# EAGLE board shupito (EAGLE 5.11)
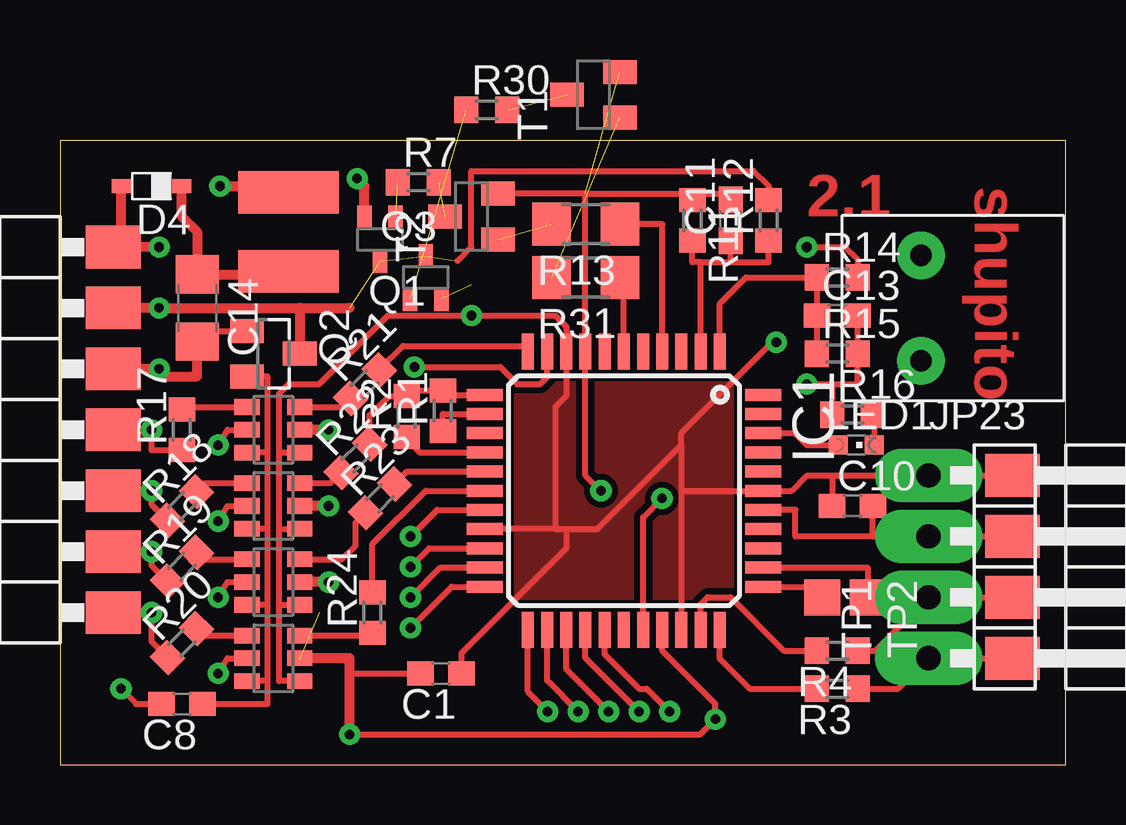
[diagram p0: board, top side]
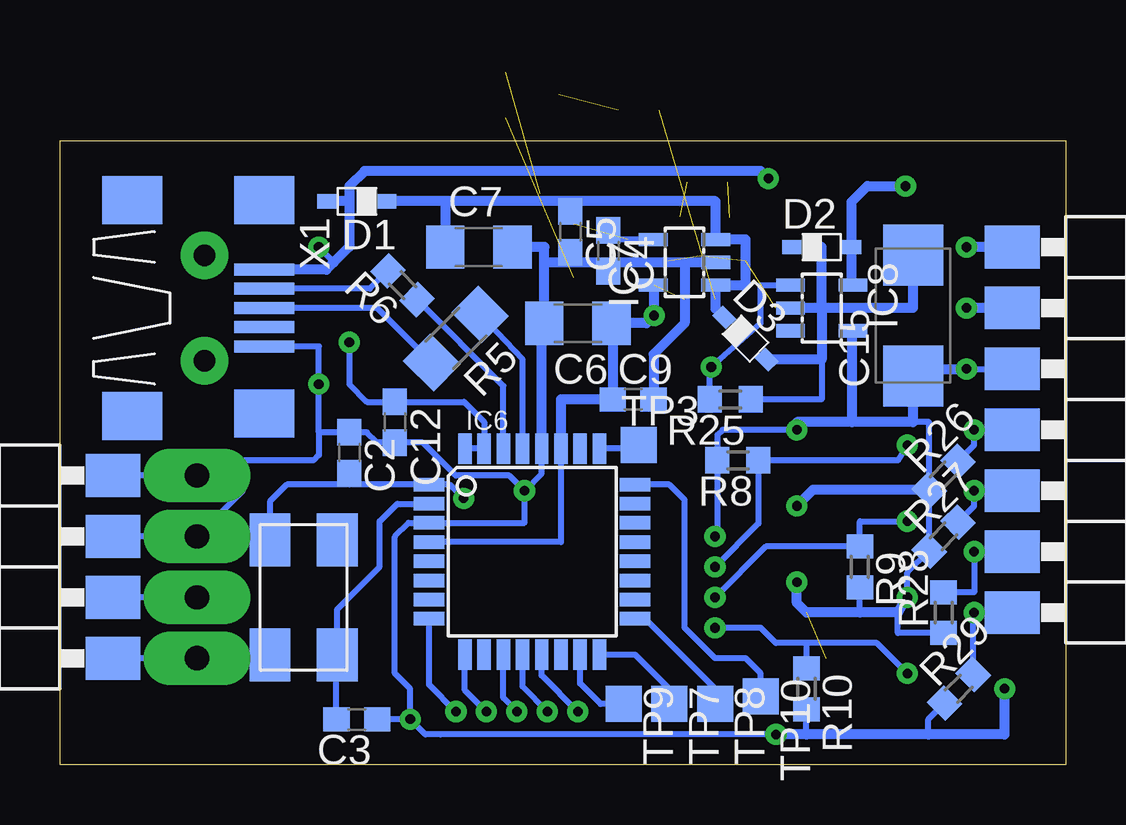
[diagram p1: board, bottom side, seen from below]

Size 41.9 x 26.02 mm. Coordinates in mm from the lower left corner, seen from the top.
Outline: 0,0 41.9,0 41.9,26.02 0,26.02 0,0
Copper layers (1*16): Top 0.018mm / dielectric 1.5mm / Bottom 0.018mm
Design rules "default *": minimum track width 0.2mm, minimum drill 0.4mm, track to track 0.2mm, track to pad 0.2mm, pad to pad 0.2mm, via to via 0.2mm, smd to smd 0.2mm, copper to edge 0.4mm, drill to drill 0.4mm, minimum pad ring 0.2mm, minimum via ring 0.2mm, stop-mask expansion 4mil, vias tented up to drill 0mil, thermal gap 10mil

## Footprints (pad centres in the part's own frame; a part is rotated, then mirrored left to right if it is on the bottom)
C0603 = smd 1.1 x 1: 1 -0.85,0; 2 0.85,0
C1206 = smd 1.6 x 1.8: 1 -1.4,0; 2 1.4,0
C/6032-28R = smd 2.55 x 2.5: + 2.525,0; - -2.525,0
SOD323 = smd 0.8 x 0.6: A 1.25,0; C -1.25,0
TQFP44 = smd 1.5 x 0.5: 1 -5.8,4; 2 -5.8,3.2; 3 -5.8,2.4; 4 -5.8,1.6; 5 -5.8,0.8; 6 -5.8,0; 7 -5.8,-0.8; 8 -5.8,-1.6; 9 -5.8,-2.4; 10 -5.8,-3.2; 11 -5.8,-4; 23 5.8,-4; 24 5.8,-3.2; 25 5.8,-2.4; 26 5.8,-1.6; 27 5.8,-0.8; 28 5.8,0; 29 5.8,0.8; 30 5.8,1.6; 31 5.8,2.4; 32 5.8,3.2; 33 5.8,4 | smd 0.5 x 1.5: 12 -4,-5.8; 13 -3.2,-5.8; 14 -2.4,-5.8; 15 -1.6,-5.8; 16 -0.8,-5.8; 17 0,-5.8; 18 0.8,-5.8; 19 1.6,-5.8; 20 2.4,-5.8; 21 3.2,-5.8; 22 4,-5.8; 34 4,5.8; 35 3.2,5.8; 36 2.4,5.8; 37 1.6,5.8; 38 0.8,5.8; 39 0,5.8; 40 -0.8,5.8; 41 -1.6,5.8; 42 -2.4,5.8; 43 -3.2,5.8; 44 -4,5.8
SOT236 = smd 0.65 x 1.06: 1 -0.95,-1.1; 2 0,-1.1; 3 0.95,-1.1; 4 0.95,1.1; 5 0,1.1; 6 -0.95,1.1
TQFP32-08 = smd 1.27 x 0.559: 1 -4.293,2.8; 2 -4.293,2; 3 -4.293,1.2; 4 -4.293,0.4; 5 -4.293,-0.4; 6 -4.293,-1.2; 7 -4.293,-2; 8 -4.293,-2.8; 17 4.293,-2.8; 18 4.293,-2; 19 4.293,-1.2; 20 4.293,-0.4; 21 4.293,0.4; 22 4.293,1.2; 23 4.293,2; 24 4.293,2.8 | smd 0.559 x 1.27: 9 -2.8,-4.293; 10 -2,-4.293; 11 -1.2,-4.293; 12 -0.4,-4.293; 13 0.4,-4.293; 14 1.2,-4.293; 15 2,-4.293; 16 2.8,-4.293; 25 2.8,4.293; 26 2,4.293; 27 1.2,4.293; 28 0.4,4.293; 29 -0.4,4.293; 30 -1.2,4.293; 31 -2,4.293; 32 -2.8,4.293
SOT23-DBV = smd 0.55 x 1.2: 1 -0.95,-1.3; 2 0,-1.3; 3 0.95,-1.3; 4 0.95,1.3; 5 -0.95,1.3
PINH1X01SMD = smd 1.778 x 2.286: 1 0,-2.223
1X04/90 = drill 1.016 long: 1 -3.81,-3.81; 2 -1.27,-3.81; 3 1.27,-3.81; 4 3.81,-3.81
1515 = smd 1.778 x 4.191: 1 -1.651,0; 2 1.651,0
CHIPLED_0603 = smd 0.8 x 0.8: A 0,-0.75; C 0,0.75
SOT323-BEC = smd 0.6 x 1: 1 -0.65,-0.9; 2 0.65,-0.9; 3 0,0.9
SOT23 = smd 1 x 1.4: 1 -0.95,-1.1; 2 0.95,-1.1; 3 0,1.1
R0603 = smd 1 x 1.1: 1 -0.85,0; 2 0.85,0
R1206 = smd 1.6 x 1.803: 1 -1.422,0; 2 1.422,0
SOT23-BEC = smd 1 x 1.4: B -0.95,-1.1; C 0,1.1; E 0.95,-1.1
TP15SQ = smd 1.5 x 1.5: TP 0,0
USB-MB-S = smd 2.5 x 0.5: D+ 2.5,0; D- 2.5,0.8; GND 2.5,-1.6; ID 2.5,-0.8; VBUS 2.5,1.6 | smd 2.5 x 2: P$1 -3,-4.5; P$2 -3,4.5; P$3 2.5,-4.4; P$4 2.5,4.5 | drill 0.9 round: P$5 0,2.2; P$6 0,-2.2
6X3.6_LARGE = smd 2.2 x 1.7: 1 -2.4,-1.4; 2 2.4,-1.4; 3 2.4,1.4; 4 -2.4,1.4

## Placement (x,y rotation side)
C1  100n  [C0603]  15.88,3.81 180 top
C2  18p  [C0603]  29.84,13.02 270 bottom
C3  18p  [C0603]  29.53,1.91 180 bottom
C4  10n  [C0603]  19.05,21.43 270 bottom
C5  100n  [C0603]  20.64,22.23 270 bottom
C6  2.2u  [C1206]  20.32,18.41 180 bottom
C7  4.7u  [C1206]  24.45,21.59 0 bottom
C8  100n  [C0603]  5.08,2.54 180 top
C9  100n  [C0603]  18.02,15.24 0 bottom
C10  100n  [C0603]  33.02,10.79 0 top
C11  10n  [C0603]  27.94,22.7 90 top
C12  100n  [C0603]  27.94,14.29 270 bottom
C13  10n  [C0603]  32.38,18.73 0 top
C14  10u-1759434  [C1206]  5.71,19.05 270 top
C15  68u-1672624  [C/6032-28R]  6.35,18.73 90 bottom
D1  BAT42WS  [SOD323]  29.53,23.5 180 bottom
D2  PMEG2005-1757760  [SOD323]  10.16,21.59 0 bottom
D3  BAT42WS  [SOD323]  13.34,17.78 315 bottom
D4  PMEG4010CEJ-1757777  [SOD323]  3.81,24.13 180 top
IC1  AVR_XMEGA_A4_44A  [TQFP44]  23.5,11.43 270 top
IC2  74LVC1T45  [SOT236]  8.89,13.97 90 top
IC3  74LVC1T45  [SOT236]  8.89,10.79 90 top
IC4  74LVC1T45  [SOT236]  8.89,7.62 90 top
IC5  74LVC1T45  [SOT236]  8.89,4.45 90 top
IC6  ATMEGA8U2  [TQFP32-08]  22.23,8.89 0 bottom
IC7  TPS73033DBV  [SOT23-DBV]  15.88,20.95 90 bottom
IC8  NCP1400A  [SOT23-DBV]  10.16,19.05 270 bottom
JP1  PINH1X01SMD  [PINH1X01SMD]  0,13.97 90 top
JP2  PINH1X01SMD  [PINH1X01SMD]  0,11.43 90 top
JP3  PINH1X01SMD  [PINH1X01SMD]  0,8.89 90 top
JP4  PINH1X01SMD  [PINH1X01SMD]  0,6.35 90 top
JP5  PINH1X01SMD  [PINH1X01SMD]  0,19.05 90 top
JP6  PINH1X01SMD  [PINH1X01SMD]  0,16.51 90 top
JP7  PINH1X01SMD  [PINH1X01SMD]  41.91,4.45 270 top
JP8  PINH1X01SMD  [PINH1X01SMD]  41.91,6.99 270 top
JP9  PINH1X01SMD  [PINH1X01SMD]  41.91,9.53 270 top
JP10  PINH1X01SMD  [PINH1X01SMD]  41.91,12.06 270 top
JP11  PINH1X01SMD  [PINH1X01SMD]  0,21.59 90 top
JP12  PINH1X01SMD  [PINH1X01SMD]  0,13.97 270 bottom
JP13  PINH1X01SMD  [PINH1X01SMD]  0,19.05 270 bottom
JP14  PINH1X01SMD  [PINH1X01SMD]  0,11.43 270 bottom
JP15  PINH1X01SMD  [PINH1X01SMD]  0,8.89 270 bottom
JP16  PINH1X01SMD  [PINH1X01SMD]  0,6.35 270 bottom
JP17  PINH1X01SMD  [PINH1X01SMD]  0,16.51 270 bottom
JP18  PINH1X01SMD  [PINH1X01SMD]  0,21.59 270 bottom
JP19  PINH1X01SMD  [PINH1X01SMD]  41.91,4.45 90 bottom
JP20  PINH1X01SMD  [PINH1X01SMD]  41.91,6.99 90 bottom
JP21  PINH1X01SMD  [PINH1X01SMD]  41.91,9.53 90 bottom
JP22  PINH1X01SMD  [PINH1X01SMD]  41.91,12.06 90 bottom
JP23  BTH  [1X04/90]  40.01,8.26 270 top
L2  22u-1782802  [1515]  9.53,22.23 90 top
LED1  ORANGE-8554552  [CHIPLED_0603]  33.18,13.34 270 top
Q1  BC807W-1907646  [SOT323-BEC]  13.34,21.91 180 top
Q2  NX2301P-1894738  [SOT23]  8.89,17.14 270 top
Q3  BC807W-1907646  [SOT323-BEC]  15.24,20.32 0 top
R1  22  [R0603]  15.95,14.76 90 top
R2  22  [R0603]  14.45,14.53 90 top
R3  100  [R0603]  32.38,3.17 180 top
R4  100  [R0603]  32.38,4.76 180 top
R5  22  [R1206]  25.4,17.78 225 bottom
R6  22  [R0603]  27.63,20 135 bottom
R7  10k  [R0603]  14.92,24.29 0 top
R8  10k  [R0603]  13.65,12.7 180 bottom
R9  10k  [R0603]  8.57,8.26 270 bottom
R10  10k  [R0603]  10.8,3.18 270 bottom
R11  1k5  [R0603]  26.35,22.7 270 top
R12  6k8  [R0603]  29.53,22.7 90 top
R13  47k  [R1206]  21.91,22.54 180 top
R14  6k8  [R0603]  32.38,20.32 0 top
R15  1k5  [R0603]  32.38,17.14 0 top
R16  68  [R0603]  33.02,14.61 0 top
R17  100  [R0603]  5.08,13.97 90 top
R18  100  [R0603]  5.08,10.79 45 top
R19  100  [R0603]  5.08,8.26 45 top
R20  100  [R0603]  5.08,5.08 45 top
R21  100  [R0603]  12.7,15.88 45 top
R22  100  [R0603]  12.3,12.78 45 top
R23  100  [R0603]  13.34,11.11 45 top
R24  100  [R0603]  13.02,6.35 90 top
R25  68k  [R0603]  13.97,15.24 180 bottom
R26  100  [R0603]  5.08,12.06 45 bottom
R27  100  [R0603]  5.08,9.53 45 bottom
R28  100  [R0603]  5.08,6.35 90 bottom
R29  100  [R0603]  4.45,3.17 45 bottom
R30  10k  [R0603]  17.78,27.3 0 top
R31  47k  [R1206]  21.91,20.32 180 top
T1  PDTC114TT-1757986  [SOT23-BEC]  22.23,27.94 90 top
T2  PDTC114TT-1757986  [SOT23-BEC]  17.14,22.86 90 top
TP1  TPTP15SQ  [TP15SQ]  31.75,6.99 270 top
TP2  TPTP15SQ  [TP15SQ]  33.66,6.99 270 top
TP3  TPTP15SQ  [TP15SQ]  17.78,13.34 0 bottom
TP7  TPTP15SQ  [TP15SQ]  16.51,2.54 270 bottom
TP8  TPTP15SQ  [TP15SQ]  14.61,2.54 270 bottom
TP9  TPTP15SQ  [TP15SQ]  18.41,2.54 270 bottom
TP10  TPTP15SQ  [TP15SQ]  12.7,2.86 270 bottom
X1  [USB-MB-S]  35.88,19.05 0 bottom
X2  ABMM2-8MHz  [6X3.6_LARGE]  31.75,6.99 90 bottom

## Library data of the parts
C1-C15 R1-R31 = rcl
D1-D4 = diode
IC1 = xmega
IC2-IC5 = 74lvc1t45
IC6 = atmega_u2
IC7 = tps73033
IC8 = ncp1400a
JP1-JP22 = pinhead_smd
JP23 = pinhead
L2 = inductors
LED1 = led
Q1 Q3 = transistor-pnp
Q2 = transistors
T1 T2 = transistor
TP1-TP3 TP7-TP10 = testpad
X1 = con-usb-3
X2 = xtal

## Nets
3V3_SUP: IC1.6 R31.1
5V0_SUP: IC1.4 R13.1
+5V: D1.A Q1.2 R14.2 X1.VBUS
D+: IC6.29 R5.1
D-: IC6.30 R6.1
EM_BOOT: IC6.25 TP3.TP
GND: C1.2 C2.1 C3.1 C4.2 C5.2 C6.2 C7.2 C8.2 C9.2 C10.2 C11.2 C12.2 C13.2 C14.2 C15.- IC1.8 IC1.18 IC1.30 IC1.38 IC2.2 IC3.2 IC4.2 IC4.5 IC5.2 IC6.3 IC6.28 IC7.2 IC8.4 JP6.1 JP9.1 JP17.1 JP21.1 JP23.2 Q2.1 R8.2 R9.2 R10.2 R11.1 R15.2 R16.1 R26.1 R27.1 R28.1 R29.1 T1.E T2.E X1.GND
LED: IC1.42 LED1.A
N$1: JP7.1 JP19.1 JP23.4 R3.1
N$2: IC1.35 TP2.TP
N$3: IC1.34 TP1.TP
N$4: IC1.15 R2.1
N$5: IC2.4 R17.2
N$6: R31.2 T1.B
N$7: JP2.1 JP14.1 R18.1 R27.2
N$8: IC1.13 R1.1
N$9: IC3.4 R18.2
N$10: JP8.1 JP20.1 JP23.3 R4.1
N$11: IC1.32 R4.2
N$12: IC1.33 R3.2
N$13: R6.2 X1.D-
N$14: R5.2 X1.D+
N$16: C14.1 D4.C L2.1
N$17: C4.1 IC7.4
N$18: IC6.24 TP10.TP
N$19: Q1.1 R7.1
N$20: R13.2 T2.B
N$21: C5.1 C7.1 D1.C D3.C IC7.1 IC7.3
N$22: D2.A IC8.5 L2.2
N$23: R7.2 T2.C
N$24: LED1.C R16.2
N$25: IC4.4 R19.2
N$26: R30.2 T1.C
N$27: IC5.4 R20.2
N$28: Q3.1 R30.1
N$29: C8.1 IC2.6 IC3.6 IC4.6 IC5.6 Q2.2
N$30: IC2.3 R21.1
N$31: IC3.3 R22.1
N$32: IC4.3 R23.1
N$33: IC5.3 R24.1
N$34: C3.2 IC6.2 X2.1
N$35: JP1.1 JP12.1 R17.1 R26.2
N$36: JP3.1 JP15.1 R19.1 R28.2
N$37: JP4.1 JP16.1 R20.1 R29.2
PDI: IC1.12 R1.2 R2.2 R22.2
PDID: IC1.21 IC3.5 R9.1
PWR_EN: IC1.10 IC8.1 R25.2
RST: IC1.11 R21.2
RSTD: IC1.20 IC2.5 R8.1
RXD: IC1.16 R23.2
SWITCHED_5V: C15.+ D2.C D3.A IC8.2 R25.1
SYS_CLK: C2.2 IC1.29 IC6.1 X2.3
TXD: IC1.17 R24.2
TXDD: IC1.22 IC5.5 R10.1
USB_CTS: IC1.24 IC6.12
USB_PDI: IC6.16 TP7.TP
USB_PDO: IC6.17 TP8.TP
USB_RTR: IC1.23 IC6.13
USB_RX: IC1.26 IC6.9
USB_SCK: IC6.15 TP9.TP
USB_TX: IC1.27 IC6.8
USB_VCC: C13.1 IC1.1 R14.1 R15.1
USB_XCK: IC1.25 IC6.11
VCC: C1.1 C6.1 C9.1 C10.1 C12.1 IC1.9 IC1.19 IC1.31 IC1.39 IC2.1 IC3.1 IC4.1 IC5.1 IC6.4 IC6.27 IC6.31 IC6.32 IC7.5 JP10.1 JP22.1 JP23.1 Q3.2
VCCIO: JP5.1 JP13.1 Q1.3 Q2.3 Q3.3 R12.2
VDD: D4.A JP11.1 JP18.1
VDD_ADC: C11.1 IC1.2 R11.2 R12.1

## Tracks (layer width: path | path; a pad name or v marks a point on that pad's centre or on a via)
3V3_SUP
  Top 0.254: IC1.6 23.5,20.32 R31.1
5V0_SUP
  Top 0.254: IC1.4 25.09,22.54 R13.1
+5V  (via drill 0.4)
  Top 0.254: R14.2 33.23,21.06 32.7,21.59 v31.11,21.59
  Top 0.406: Q1.2 12.69,24.14 v12.38,24.45
  Bottom 0.254: v31.11,21.59 | 30.49,20.96 v31.11,21.59 | v12.38,24.45 12.38,24.43
  Bottom 0.406: X1.VBUS 30.8,20.65 30.49,20.96 29.84,21.6 29.84,23.5 | 29.84,23.5 29.84,24.13 29.21,24.77 12.7,24.77 v12.38,24.45 | 29.84,23.5 D1.A
D+
  Bottom 0.254: IC6.29 22.62,16.91 R5.1
D-
  Bottom 0.254: IC6.30 23.43,15.8 R6.1
EM_BOOT
  Bottom 0.254: IC6.25 17.78,13.18 TP3.TP
GND  (via drill 0.4)  (2 unrouted)
  Top 0.254: C8.2 3.17,2.54 v2.54,3.17 | JP21.1 JP23.2 33.87,9.53 | IC1.38 30.64,10.63 30.64,9.53 33.87,9.53 | IC1.30 25.09,4.75 27.3,2.54 v27.3,1.91 26.67,1.27 v12.06,1.27 | IC4.5 6.99,7.62 v6.59,6.99 | 21.89,23.81 IC1.8 21.89,12.08 v22.54,11.43 | 26.35,23.81 R11.1 | 21.89,23.81 26.35,23.81 | C11.2 27.94,23.81 26.35,23.81 | 33.87,9.53 C10.2 | Q2.1 5.71,18.09 C14.2 | 32.17,15.88 33.23,15.88 R15.2 C13.2 | 21.89,23.81 T2.E | IC1.18 15.71,10.63 v14.61,9.53 | 32.17,15.88 R16.1 | v31.11,15.88 32.17,15.88 | C1.2 12.06,3.81 12.06,3.17
  Top 0.406: v11.19,10.79 IC3.2 | v11.19,7.62 IC4.2 | v11.19,13.97 IC2.2 | IC5.2 12.06,4.45 12.06,3.17 v12.06,1.27 | v12.06,1.27 | JP17.1 v4.13,16.51 4.45,16.19 5.71,16.19 C14.2
  Bottom 0.254: v22.54,11.43 22.54,10.09 IC6.3 27.38,10.09 27.94,9.53 27.94,3.81 27.3,3.17 v27.3,1.91 | v12.06,1.27 26.04,1.27 26.67,1.27 v27.3,1.91 | JP21.1 JP23.2 34.29,11.43 34.29,12.7 31.33,12.7 31.11,12.91 31.11,13.87 | 10.79,1.27 R10.2 | 8.57,6.35 R9.2 | 8.89,18.1 IC8.4 | 19.05,20.95 C4.2 | 20.64,20.95 C5.2 | IC6.28 21.82,12.15 v22.54,11.43 | X1.GND 31.11,17.45 v31.11,15.88 31.11,13.87 | v27.3,1.91 C3.1 | 31.11,13.87 C2.1 29.11,13.87 28.68,13.44 C12.2 26.77,13.44 25.4,12.06 23.18,12.06 v22.54,11.43 | v11.19,13.97 14.29,13.97 14.5,13.76 R8.2 14.5,9.63 v14.61,9.53 | v4.13,16.51 JP17.1 | R28.1 6.99,5.5 6.99,6.35 | v6.59,6.99 6.59,8.02 R27.1 R26.1 5.68,14.29 6.35,14.29 | R29.1 5.71,1.91 5.71,1.27
  Bottom 0.406: v2.54,3.17 2.54,1.27 5.71,1.27 10.79,1.27 v12.06,1.27 | v12.06,1.27 | v11.19,7.62 11.19,6.75 10.79,6.35 8.57,6.35 6.99,6.35 v6.59,6.99 | 8.89,14.29 6.35,14.29 C15.- 6.35,16.51 v4.13,16.51 | 8.89,14.29 8.89,18.1 | 15.88,20.95 19.05,20.95 20.64,20.95 21.72,20.95 | 15.88,20.95 IC7.2 | C7.2 21.72,21.59 21.72,20.95 | 8.89,14.29 11.19,14.29 v11.19,13.97 | 21.72,20.95 C6.2 21.82,18.41 IC6.28 | 15.88,20.95 15.88,18.41 17.17,17.12 C9.2 | v11.19,10.79 10.52,11.46 R26.1
LED
  Top 0.254: IC1.42 30.62,13.83 31.11,13.34 LED1.A
N$1
  Top 0.254: JP19.1 JP23.4 34.92,3.17 R3.1
  Bottom 0.254: JP23.4 JP19.1
N$2
  Top 0.254: IC1.35 33.66,8.23 TP2.TP
N$3
  Top 0.254: IC1.34 31.75,7.43 TP1.TP
N$4
  Top 0.254: IC1.15 14.99,13.03 14.45,13.57 R2.1
N$5
  Top 0.254: IC2.4 5.08,14.92 R17.2
N$6  (1 unrouted)
N$7  (via drill 0.4)
  Top 0.254: JP14.1 v3.81,11.43 3.81,10.86 R18.1
  Bottom 0.254: JP14.1 v3.81,11.43 3.81,10.79 R27.2
N$8
  Top 0.254: IC1.13 15.95,14.63 R1.1
N$9
  Top 0.254: IC3.4 6.03,11.74 R18.2
N$10
  Top 0.254: JP20.1 JP23.3 33.97,4.76 R4.1
  Bottom 0.254: JP23.3 JP20.1
N$11
  Top 0.254: R4.2 30.16,4.76 27.94,6.99 26.99,6.99 26.7,6.69 IC1.32
N$12
  Top 0.254: IC1.33 27.5,4.41 28.73,3.17 R3.2
N$13
  Bottom 0.254: R6.2 28.98,19.85 X1.D-
N$14
  Bottom 0.254: R5.2 28.68,19.05 X1.D+
N$16
  Top 0.254: 9.53,20.45 L2.1
  Top 0.406: 9.53,20.45 C14.1 5.71,22.23 5.06,22.88 D4.C
N$17
  Bottom 0.254: IC7.4 19.05,21.91 C4.1
N$18
  Bottom 0.254: IC6.24 16.51,11.69 15.88,11.05 15.88,5.71 14.61,4.45 13.34,4.45 12.7,3.81 TP10.TP
N$19  (1 unrouted)
N$20  (1 unrouted)
N$21
  Bottom 0.254: IC7.1 14.61,20
  Bottom 0.406: 25.85,23.5 D1.C | 25.85,23.5 C7.1 | 20.64,23.5 14.57,23.5 IC7.3 13.34,21.91 13.34,20 IC7.1 14.57,19.02 D3.C | 20.64,23.5 C5.1 | 20.64,23.5 25.85,23.5
N$22  (via drill 0.4)
  Top 0.254: 9.27,24.13 L2.2
  Top 0.406: v6.67,24.13 9.27,24.13
  Bottom 0.406: IC8.5 8.91,20 D2.A 8.91,23.48 8.26,24.13 v6.67,24.13
N$23  (1 unrouted)
N$24
  Top 0.254: LED1.C 33.93,14.61 R16.2
N$25
  Top 0.254: IC4.4 5.97,8.57 R19.2
N$26  (1 unrouted)
N$27
  Top 0.254: IC5.4 5.97,5.39 R20.2
N$28  (1 unrouted)
N$29
  Top 0.254: Q2.2 8.65,16.2 8.65,13.02 | 8.65,13.02 IC2.6 | 8.65,9.85 IC3.6 | 8.65,9.85 8.65,13.02 | 8.65,6.67 IC4.6 | 8.65,6.67 8.65,9.85 | 8.65,3.5 IC5.6 | 8.65,3.5 8.65,6.67 | C8.1 8.65,2.54 8.65,3.5
N$30
  Top 0.254: IC2.3 11.74,14.92 R21.1
N$31
  Top 0.254: IC3.3 11.27,11.74 R22.1
N$32
  Top 0.254: IC4.3 11.74,8.57 12.31,9.14 12.31,10.09 R23.1
N$33
  Top 0.254: IC5.3 13.02,5.39 R24.1
N$34
  Bottom 0.254: C3.2 30.38,4.58 X2.1 30.35,6.48 28.57,8.26 28.57,10.16 27.84,10.89 IC6.2
N$35  (via drill 0.4)
  Top 0.254: JP1.1 v3.81,13.97 3.81,13.12 R17.1
  Bottom 0.254: JP1.1 v3.81,13.97 3.81,13.34 R26.2
N$36  (via drill 0.4)
  Top 0.254: 2.22,9.21 JP3.1 v3.81,8.89 3.81,8.32 R19.1
  Bottom 0.254: JP3.1 v3.81,8.89 3.81,7.2 R28.2
N$37  (via drill 0.4)
  Top 0.254: JP4.1 v3.81,6.35 3.81,5.15 R20.1
  Bottom 0.254: JP4.1 v3.81,6.35 3.84,6.35 R29.2
PDI
  Top 0.254: IC1.12 15.95,15.43 R1.2 14.45,15.61 R2.2 13.71,15.38 12.9,14.57 R22.2
PDID  (via drill 0.4)
  Top 0.254: IC1.21 15.85,8.23 v14.61,6.99 | v6.59,10.16 6.99,10.79 IC3.5
  Bottom 0.254: v6.59,10.16 8.57,10.16 R9.1 12.48,9.11 v14.61,6.99
PWR_EN  (via drill 0.4)
  Top 0.254: IC1.10 20.3,16.17 20,15.88 19.05,15.88 18.34,16.59 v14.76,16.59
  Bottom 0.254: IC8.1 12.7,20 12.7,18.41 v14.76,16.59 14.82,16.53 R25.2
RST
  Top 0.254: R21.2 14.29,17.47 19.5,17.47 IC1.11
RSTD  (via drill 0.4)
  Top 0.254: v6.59,13.34 6.99,13.97 IC2.5 | v14.61,8.26 15.38,9.03 IC1.20
  Bottom 0.254: 10.79,12.7 6.99,12.7 v6.59,13.34 | 10.79,12.7 R8.1 12.8,10.06 v14.61,8.26 | 10.79,12.7
RXD
  Top 0.254: IC1.16 14.45,12.23 R23.2
SWITCHED_5V
  Bottom 0.254: R25.1 10.16,15.24 10.16,16.9
  Bottom 0.406: 10.16,19.05 IC8.2 | D3.A 10.16,16.9 10.16,19.05 | D2.C 10.16,21.59 10.16,19.05 | C15.+ 6.35,19.05 10.16,19.05
SYS_CLK  (via drill 0.4)
  Top 0.254: IC1.29 24.3,10.32 v25.08,11.11
  Bottom 0.254: 29.84,11.69 IC6.1 25.66,11.69 v25.08,11.11 | 29.84,11.69 C2.2 | 29.84,11.69 32.44,11.69 33.15,10.98 X2.3
TXD
  Top 0.254: IC1.17 15.24,11.43 13.02,9.21 R24.2
TXDD  (via drill 0.4)
  Top 0.254: v6.59,3.81 6.99,4.45 IC5.5 | IC1.22 16.32,7.43 v14.61,5.71
  Bottom 0.254: v14.61,5.71 12.7,5.71 12.06,5.08 10.79,5.08 | v6.59,3.81 7.86,5.08 10.79,5.08 | 10.79,5.08 R10.1
USB_CTS  (via drill 0.4)
  Top 0.254: IC1.24 20.3,3.52 v21.59,2.22
  Bottom 0.254: IC6.12 22.62,3.26 v21.59,2.22
USB_PDI
  Bottom 0.254: TP7.TP 16.51,3.17 17.93,4.6 IC6.16
USB_PDO
  Bottom 0.254: IC6.17 17.52,6.09 14.61,3.17 TP8.TP
USB_RTR  (via drill 0.4)
  Top 0.254: IC1.23 19.5,3.05 v20.32,2.22
  Bottom 0.254: IC6.13 21.82,3.73 v20.32,2.22
USB_RX  (via drill 0.4)
  Top 0.254: IC1.26 21.89,4.46 v24.13,2.22
  Bottom 0.254: IC6.9 25.02,3.12 v24.13,2.22
USB_SCK
  Bottom 0.254: TP9.TP 19.37,2.54 20.23,3.4 IC6.15
USB_TX  (via drill 0.4)
  Top 0.254: IC1.27 22.7,4.61 24.13,3.17 24.45,3.17 v25.4,2.22
  Bottom 0.254: IC6.8 26.52,3.34 v25.4,2.22
USB_VCC
  Top 0.254: R15.1 C13.1 R14.1 28.57,20.32 27.5,19.24 IC1.1
USB_XCK  (via drill 0.4)
  Top 0.254: IC1.25 21.09,3.99 v22.86,2.22
  Bottom 0.254: IC6.11 23.43,2.79 v22.86,2.22
VCC  (via drill 0.4)  (1 unrouted)
  Top 0.254: 20.64,9.83 21.09,9.83 | 25.89,11.43 IC1.31 | 25.89,13.34 25.89,11.43 | 25.89,13.34 25.89,13.83 29.69,17.62 v29.84,17.62 | 32.17,12.06 JP23.1 JP22.1 | 21.09,9.83 21.09,9.03 16.73,4.66 C1.1 | IC5.1 9.13,3.5 9.13,6.67 | 9.13,13.02 IC2.1 | 9.13,6.67 IC4.1 | 9.13,6.67 9.13,9.85 | 9.13,9.85 IC3.1 | 9.13,9.85 9.13,13.02 | 9.13,13.02 9.13,15.48 9.53,15.88 10.79,15.88 13.65,18.73 v17.14,18.73 20.64,18.73 21.09,18.27 IC1.9 21.09,15.38 20.64,14.92 20.64,9.83 | 32.17,12.06 C10.1 | 25.89,11.43 IC1.39 30.48,11.43 31.11,12.06 32.17,12.06 | 20.64,9.83 IC1.19 | 21.09,9.83 22.39,9.83 25.89,13.34
  Bottom 0.254: IC6.32 IC6.31 24.23,14.3 25.06,15.14 C12.1 29.11,15.14 29.84,15.88 v29.84,17.62 | IC6.4 21.02,9.29 IC6.27 | JP23.1 JP22.1 | 17.14,20 IC7.5
  Bottom 0.406: IC6.27 21.02,15.24 C9.1 18.87,18.41 C6.1 17.46,18.41 v17.14,18.73 17.14,20
  pour Top (isolate 0.254): 19.05,15.88 27.94,15.88 27.94,6.99 19.05,6.99
VCCIO  (via drill 0.4)  (3 unrouted)
  Top 0.254: 16.56,21.01 17.14,21.59 17.14,24.77 28.89,24.77 29.53,24.13 R12.2
  Top 0.406: 9.99,19.05 v4.13,19.05 JP13.1 | 9.99,19.05 Q2.3 | 9.99,19.05 12.06,19.05
  Bottom 0.406: JP13.1 v4.13,19.05
VDD  (via drill 0.4)
  Top 0.406: v4.13,21.59 JP18.1 2.56,21.59 D4.A
  Bottom 0.406: JP18.1 v4.13,21.59
VDD_ADC
  Top 0.254: R11.2 26.35,20.95 26.7,20.95 | 26.7,20.95 27.94,20.95 | 27.94,20.95 C11.1 | 27.94,20.95 29.53,20.95 R12.1 | IC1.2 26.7,20.95

## Text on the board
Top: shupito | 2.1